# Altium PCB PCB1.PcbDoc
Units mm, origin at the board's own origin, x right, y up, seen from the top; angles counter-clockwise.
Board outline 100 x 98 mm, 2 copper layers (Top Layer, Bottom Layer); 8 components, 5 nets, 22 pads, 2 vias.
Unrouted connection lines stored in the file: 15.
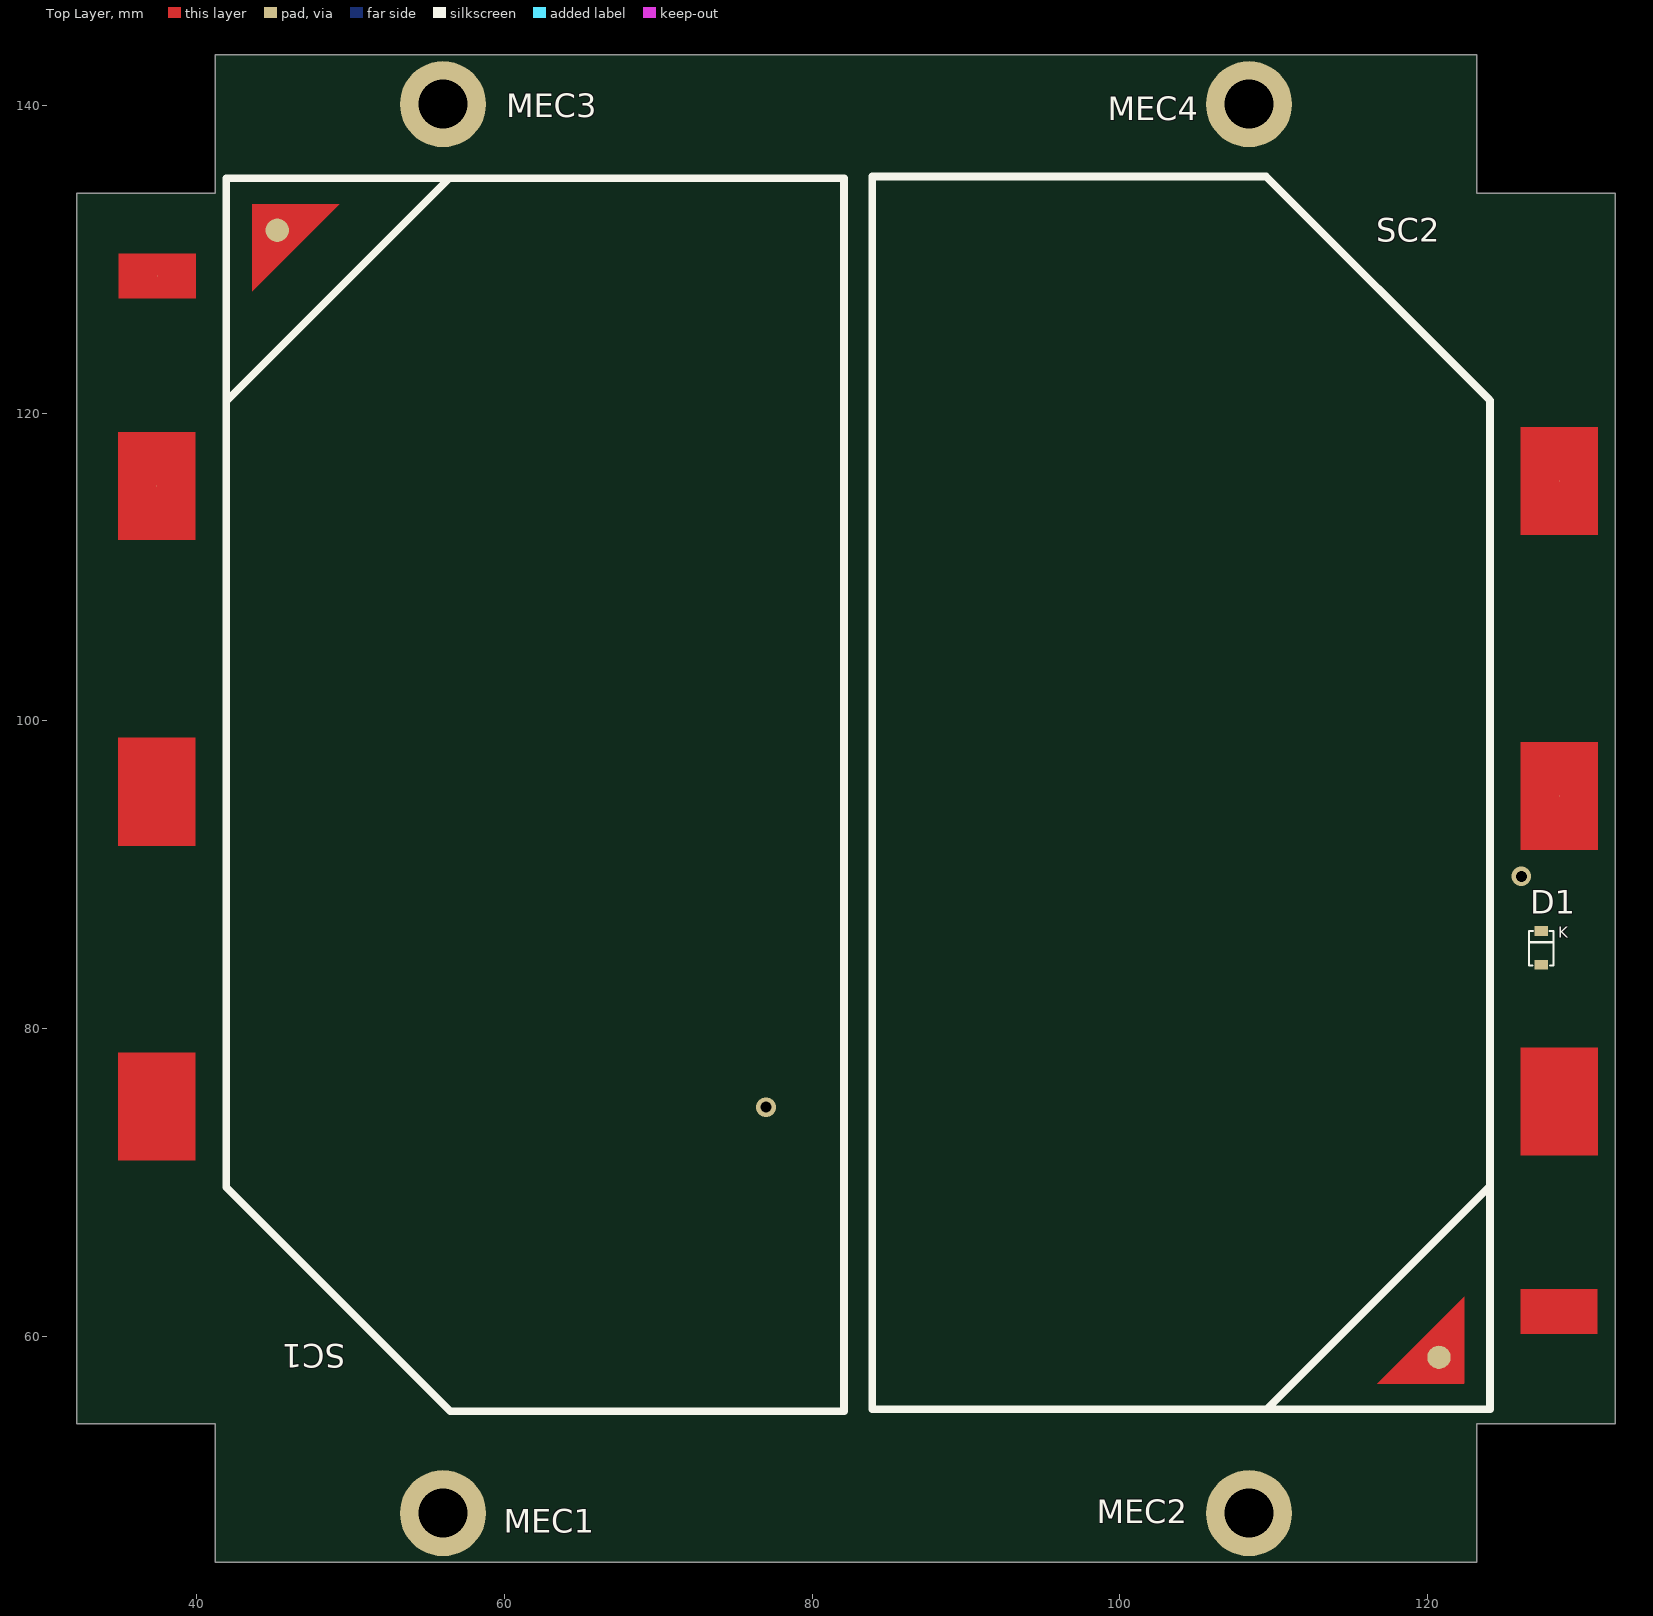
[diagram p0: Top Layer view]
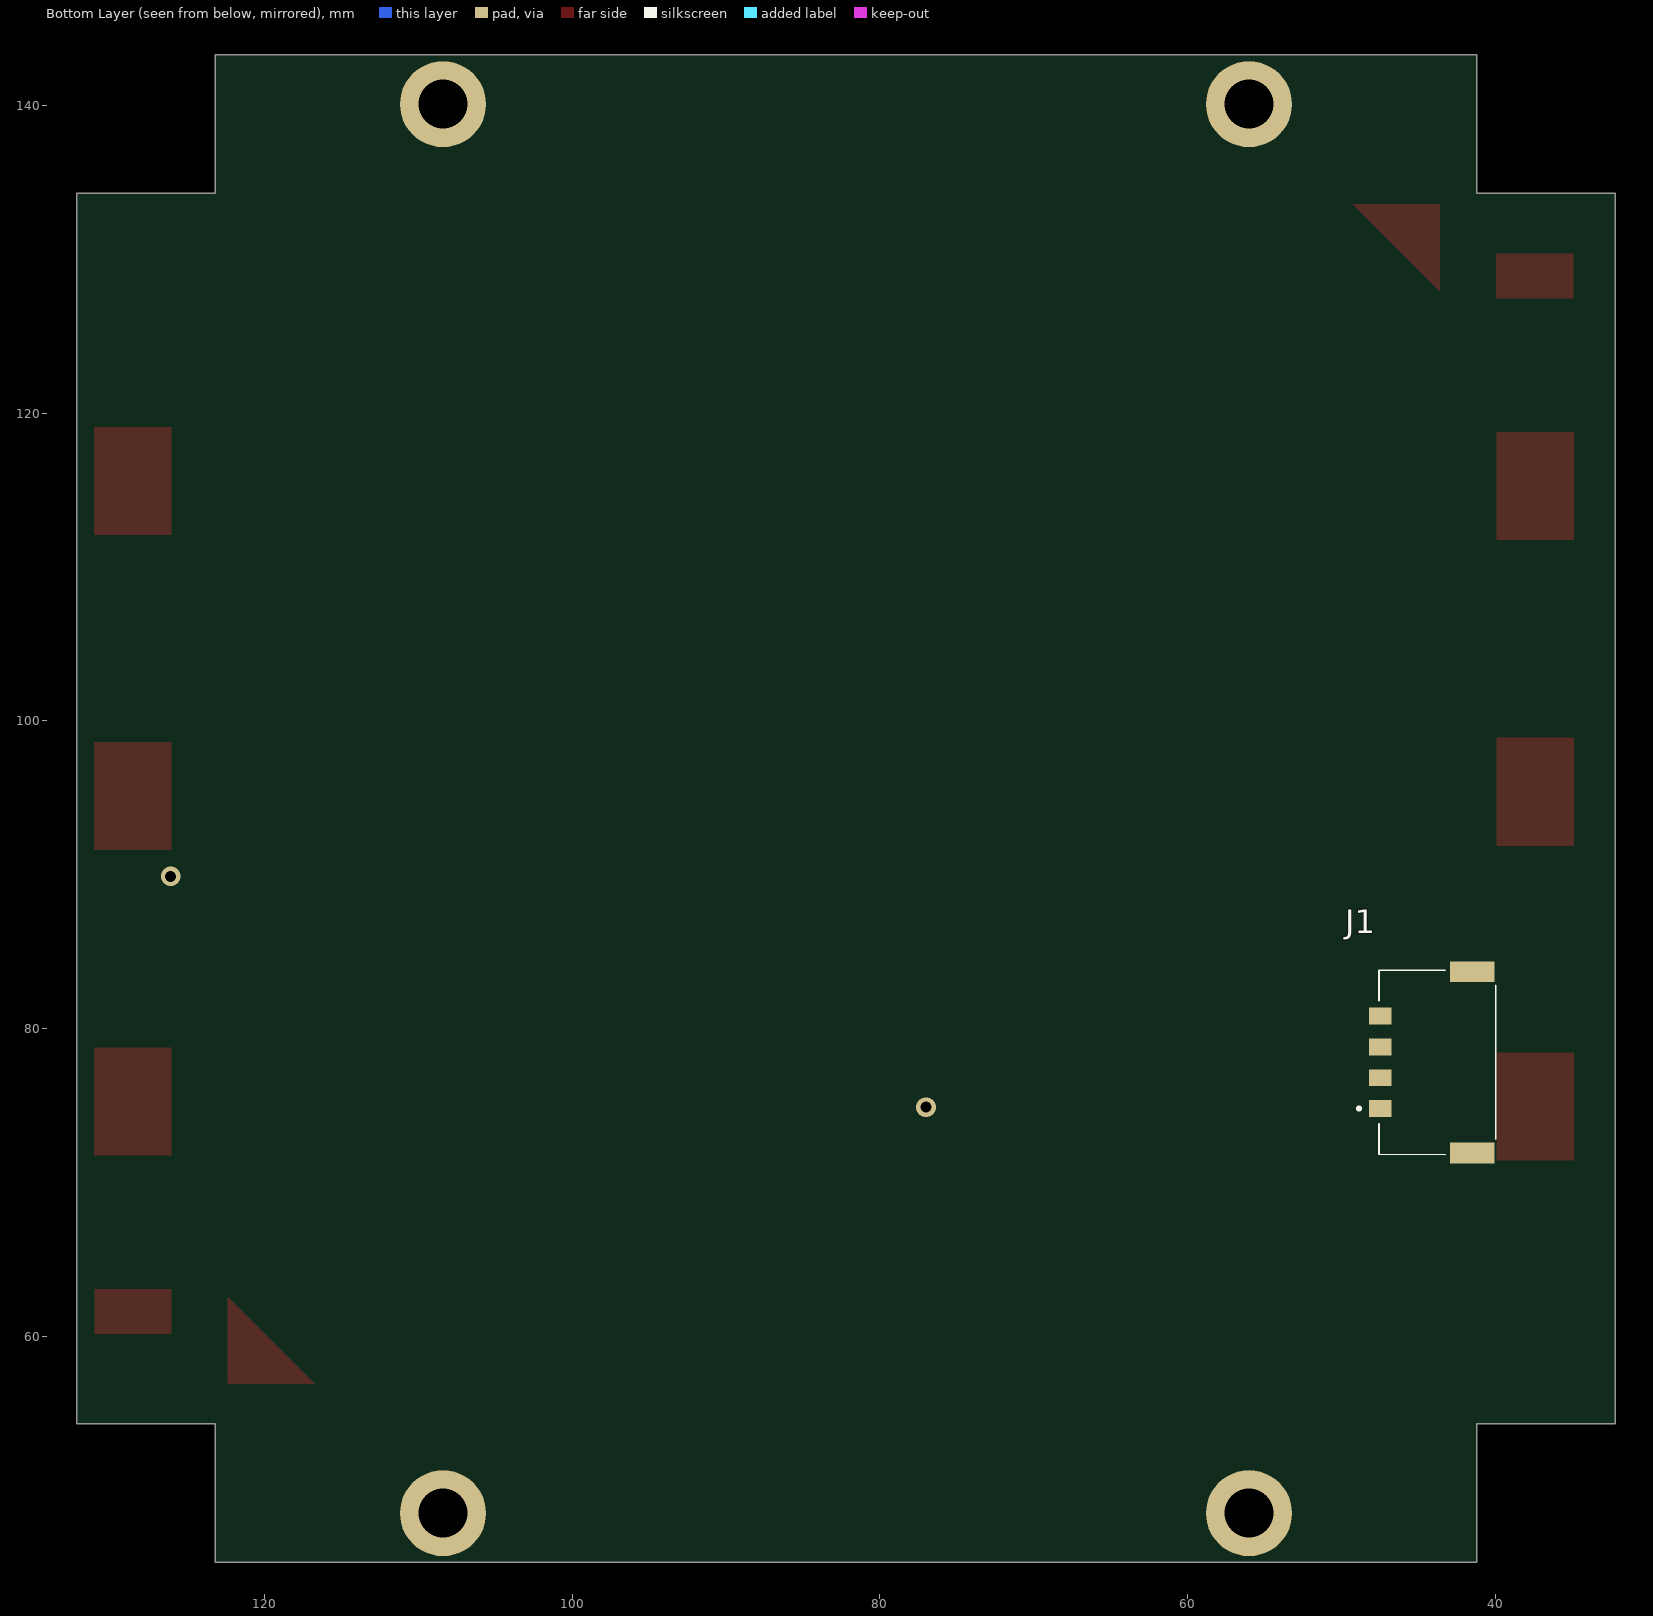
[diagram p1: Bottom Layer view, seen from below]

## Layer stack, top to bottom
Top Solder: solder mask 0.0102, Solder Resist, Dk 3.5
Top Layer: signal copper 0.0356
Dielectric 1: dielectric 0.32, FR-4, Dk 4.8
Bottom Layer: signal copper 0.0356
Bottom Solder: solder mask 0.0102, Solder Resist, Dk 3.5

## Board outline
32.2,54.3 32.2,134.3 41.2,134.3 41.2,143.3 123.2,143.3 123.2,134.3 132.2,134.3 132.2,54.3 123.2,54.3 123.2,45.3 41.2,45.3 41.2,54.3

## Design rules (kind name [scope] priority, off if disabled: settings)
Clearance [All] p1: gap=0.254 ignorepadtopadclearanceinfootprint=FALSE except(0: Arc-Hole Track-Hole SMDPad-SMDPad SMDPad-Fill SMDPad-Poly SMDPad-Region SMDPad-Hole THPad-Hole Via-Hole Fill-Hole Poly-Hole Region-Hole Text-Hole)
ComponentClearance [All] p1: gap=0 collisioncheckmode=3 verticalgap=0 showdistances=FALSE donotcheckwithout3dbody=TRUE
PolygonConnect [All] p1: connectstyle=Relief reliefconductorwidth=0.254 reliefentries=4 polygonreliefangle="90 Angle" airgapwidth=0.254
RoutingVias [All] p1: holewidth=0.711 width=1.27 viastyle="Through Hole" minholewidth=0.711 minwidth=1.27 maxholewidth=0.711 maxwidth=1.27
SolderMaskExpansion [All] p1: expansion=0.102 istentingtop=FALSE
Width [All] p1: maxlimit=0.8 minlimit=0.3 preferedwidth=0.35
29 further rules are at their usual default settings.

## Components (designator, comment, footprint, x,y, rotation, side; value= is the part's Value field where it differs from the comment)
D1 "SMD22WS-TP" SOD323F 127.4,85.2 r270 top
J1 "205338-0004" MOLEX_4PIN_HEADER 47.475,77.805 r270 bottom
MEC1 "M3" HOLE6x6mm 56,48.5 r0 top
MEC2 "M3" HOLE6x6mm 108.4,48.5 r0 top
MEC3 "M3" HOLE6x6mm 56,140.1 r0 top
MEC4 "M3" HOLE6x6mm 108.4,140.1 r0 top
SC1 "5x8mm" SOLAR_CELL 82.075,55.125 r90 top
SC2 "5x8mm" SOLAR_CELL 83.9,135.4 r270 top

## Footprints (in the part's own frame and the unit in brackets; to place one, negate y for a bottom-side part, rotate by r counter-clockwise, add the part's x,y. Pads: shape width x height; smd on the part's side, far side on the other; paste and mask are expansions set on the pad)
HOLE6x6mm [mm]
  round 5.6 hole 3.2: 0(0,0)
MOLEX_4PIN_HEADER [mm] "PDM number 205338-0004"
  rect 1.1x1.45 smd: 1(3,0) 2(1,0) 3(-1,0) 4(-3,0)
  rect 1.35x2.9 smd: MP1(5.895,5.975) MP2(-5.895,5.975)
  silkscreen extent -6,-1.48 6,7.52, body extent -6.37,-0.95 6.38,7, height 2.6
SOD323F [mm] "Diode SMD22WS-TP"
  rect 0.63x0.9 smd mask+0.05: 1(-1.15,0)
  rect 0.63x0.89 smd mask+0.05: 2(1.05,0)
  silkscreen extent -1.15,-0.8 1.1,0.8, body extent -1.45,-0.67 1.35,0.68, height 0.75
SOLAR_CELL [mm]
  round 0.025 smd: 1(73.8,44.65) 2(60.15,44.675) 3(40.275,44.675) 4(19.8,44.675)
  round 1.524 smd: 5(76.775,36.85)
  Top Layer region: 72.822,38.478 78.478,32.822 78.478,38.472 78.472,38.478
  Top Layer region: 56.65,42.175 56.65,47.175 63.65,47.175 63.65,42.175
  Top Layer region: 36.775,42.175 36.775,47.175 43.775,47.175 43.775,42.175
  Top Layer region: 23.3,42.175 23.3,47.175 16.3,47.175 16.3,42.175
  Top Layer region: 72.35,42.15 72.35,47.15 75.25,47.15 75.25,42.15
  silkscreen extent 0,0 80.16,40.16

## Part data
D1: library part DIODE_SCHOTTKY_20V_2A_SMD22WS-TP, "Diode Schottky 20 V 2A Surface Mount SOD-323", PartNumber=SMD22WS-TP
J1: "Connector", Manufacturer_Name=Molex, Mouser Part Number=538-205338-0004, Datasheet Link=https://www.molex.com/pdm_docs/sd/2053380004_sd.pdf, Height=2.8mm, Manufacturer_Part_Number=205338-0004, Mouser Price/Stock=https://www.mouser.co.uk/ProductDetail/Molex/205338-0004?qs=GedFDFLaBXGldxOQTm%2FukQ%3D%3D
MEC1 MEC2 MEC3 MEC4: library part "M3 hole", "M3 hole"
SC1 SC2: library part "SOLAR CELL", Manufacturer="Yim Space", PDM Number=SC-3GA-3

## Via types
v1: diameter 1.27, hole 0.711, Top Layer to Bottom Layer, tented both sides, 2 vias

## Nets (pads, with @x,y where several pads share a name; then routed paths per layer and width w, separated by ;. In a path a pad name is that pad's centre, name@x,y a point inside that pad or via, vN(x,y) a via of type N, cw(c..) or ccw(c..) an arc to the next point about the centre after c; other vN are vias at no path point)
GND: MEC1.0 MEC2.0 MEC3.0 MEC4.0
INPUT2_V+: D1.1 J1.3 J1.4
  other v1: 126.1,89.9
INPUT_V-: J1.1 J1.2 SC1.1 SC1.2 SC1.3 SC1.4
  other v1: 77,74.9
NetD1_2: D1.2
NetSC1_5: SC2.1 SC2.2 SC2.3 SC2.4
pads on no net: J1.MP1 J1.MP2 SC1.5 SC2.5

## Silkscreen, mask and mechanical layers (free items; w line width, h text height)
Mechanical 16:
  drawing of 38 lines, arcs and shapes, not listed
  text "1" at 36.246,189.611 h1.78
  text "2" at 108.89,189.611 h1.78
  text "3" at 182.042,189.611 h1.78
  text "4" at 254.94,189.611 h1.78
  text "Fabrication specifications:" at 161.136,178.371 h3.1
  text "A" at 1.905,166.599 h1.78
  text "A" at 288.925,166.599 h1.78
  text "- Copper base 1OZ:  / - PCB Material: Prepeg FR4-Standard / - PCB Tickness: 1.6mm / - PCB Surface: HASL (with lead)" at 161.13,161.387 h1.73
  text "- Silkscreen Color: White (top and bottom) / - Soldermask Color: Green / - Vias: Force Complete Tenting / - Special: Stack-up (herein included)" at 218.83,161.387 h1.73
  text "Assembly specifications:" at 161.411,155.391 h3.1
  text "- Solder composition: Include lead / - Fiducials: 3 top and 3 bottom avaliable / - Check BOM for not placed components" at 161.405,138.397 h1.73
  text "B" at 1.905,118.542 h1.78
  text "B" at 288.925,118.542 h1.78
  text "C" at 1.905,70.028 h1.78
  text "C" at 288.925,70.028 h1.78
  text "SpaceLab - Federal University of Santa Catarina" at 198,26 h2.5
  text "D" at 1.905,22.022 h1.78
  text "D" at 288.925,22.022 h1.78
  text "Project:" at 198,21.5 h2.5
  text "EPS2" at 206,21.5 h2.5
  text "Layer:" at 198,16.5 h2.5
  text "Designed by:" at 198,11.5 h2.5
  text "Project Code:" at 256,11.5 h2.5
  text "EPS2" at 270.5,11.5 h2.5
  text "=DesigndBy" at 211.926,11.467 h2.5
  text "=Revision" at 236.026,6.567 h2.5
  text "Date:" at 198,6.5 h2.5
  text "'.Print_Date'" at 204,6.5 h2.5
  text "Version:" at 227,6.5 h2.5
  text "Size:" at 256,6.5 h2.5
  text "A4" at 262,6.5 h2.5
  text "1" at 36.246,1.651 h1.78
  text "2" at 108.89,1.651 h1.78
  text "3" at 182.042,1.651 h1.78
  text "4" at 254.94,1.651 h1.78

## Text inside footprints (layer, text, board x,y; h text height)
D1: Top Overlay "K" at 128.5,85.9 h0.7